# Altium PCB clouds_v302.PcbDoc
Units mil, origin at the board's own origin, x right, y up, seen from the top; angles counter-clockwise.
Board outline 3500 x 4175 mil, 2 copper layers (Top, Bottom), stack 61.811 mil thick; 156 components, 107 nets, 530 pads, 148 vias.
Unrouted connection lines stored in the file: 193.
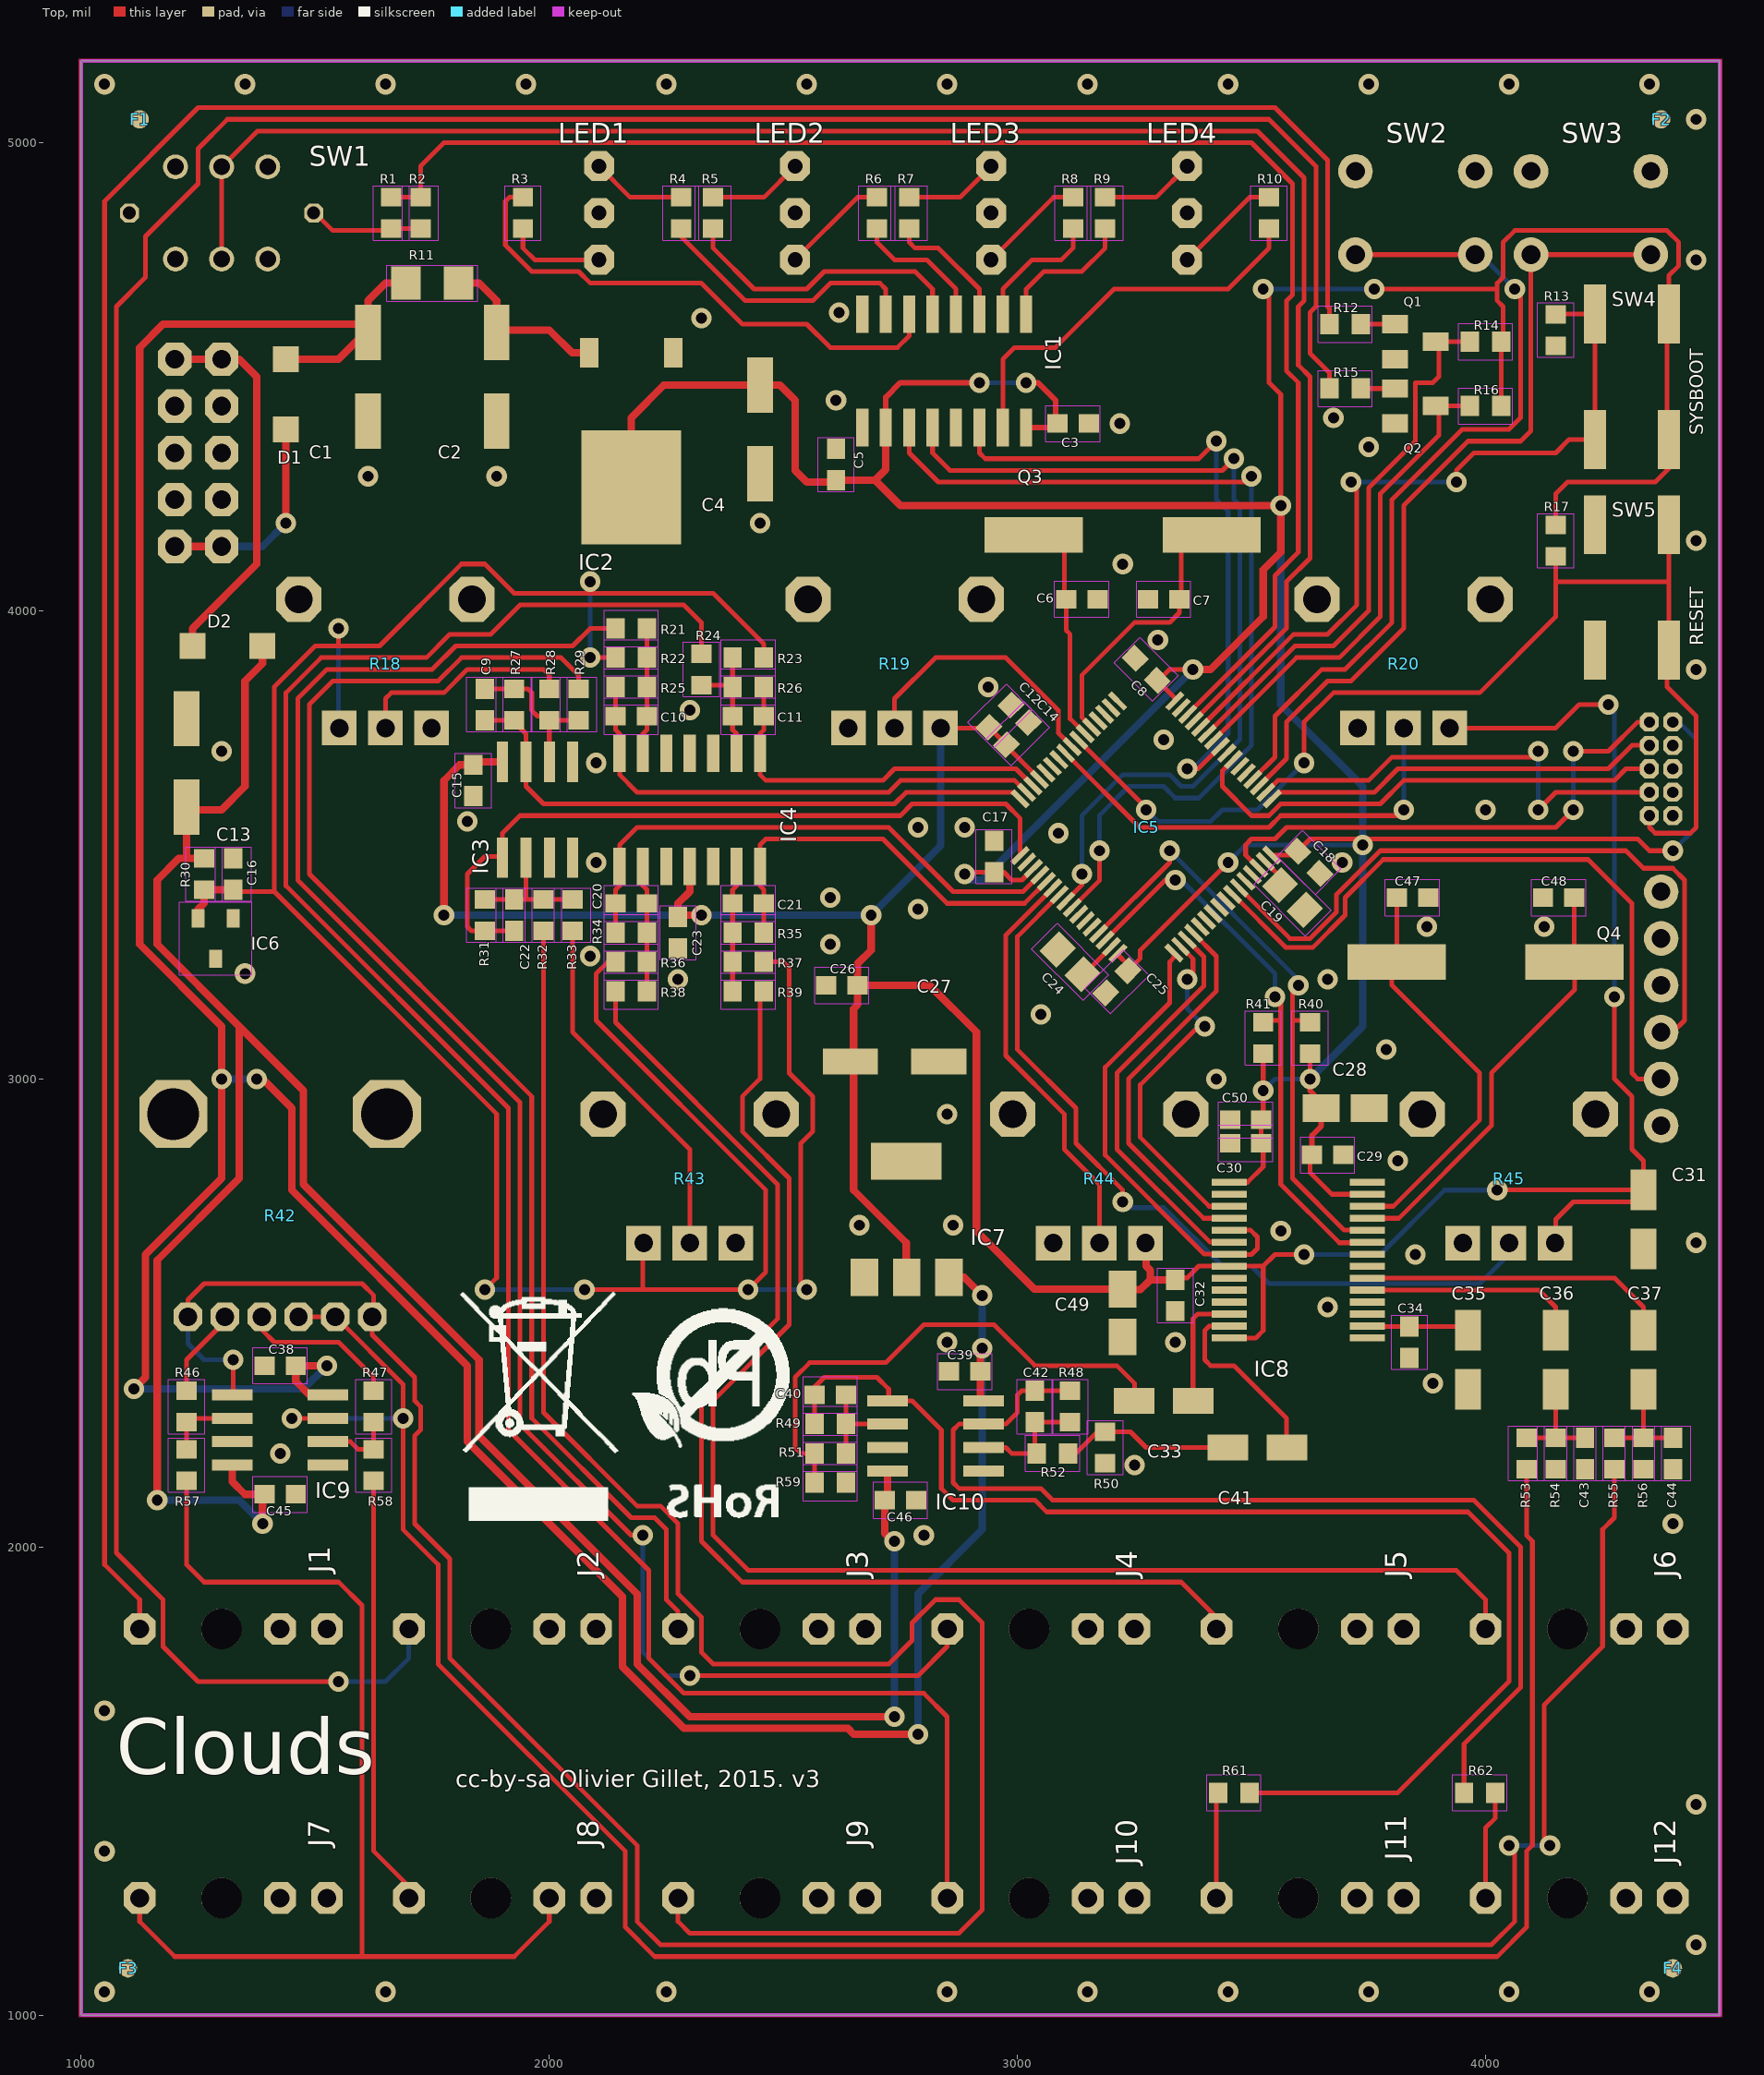
[diagram p0: Top view]
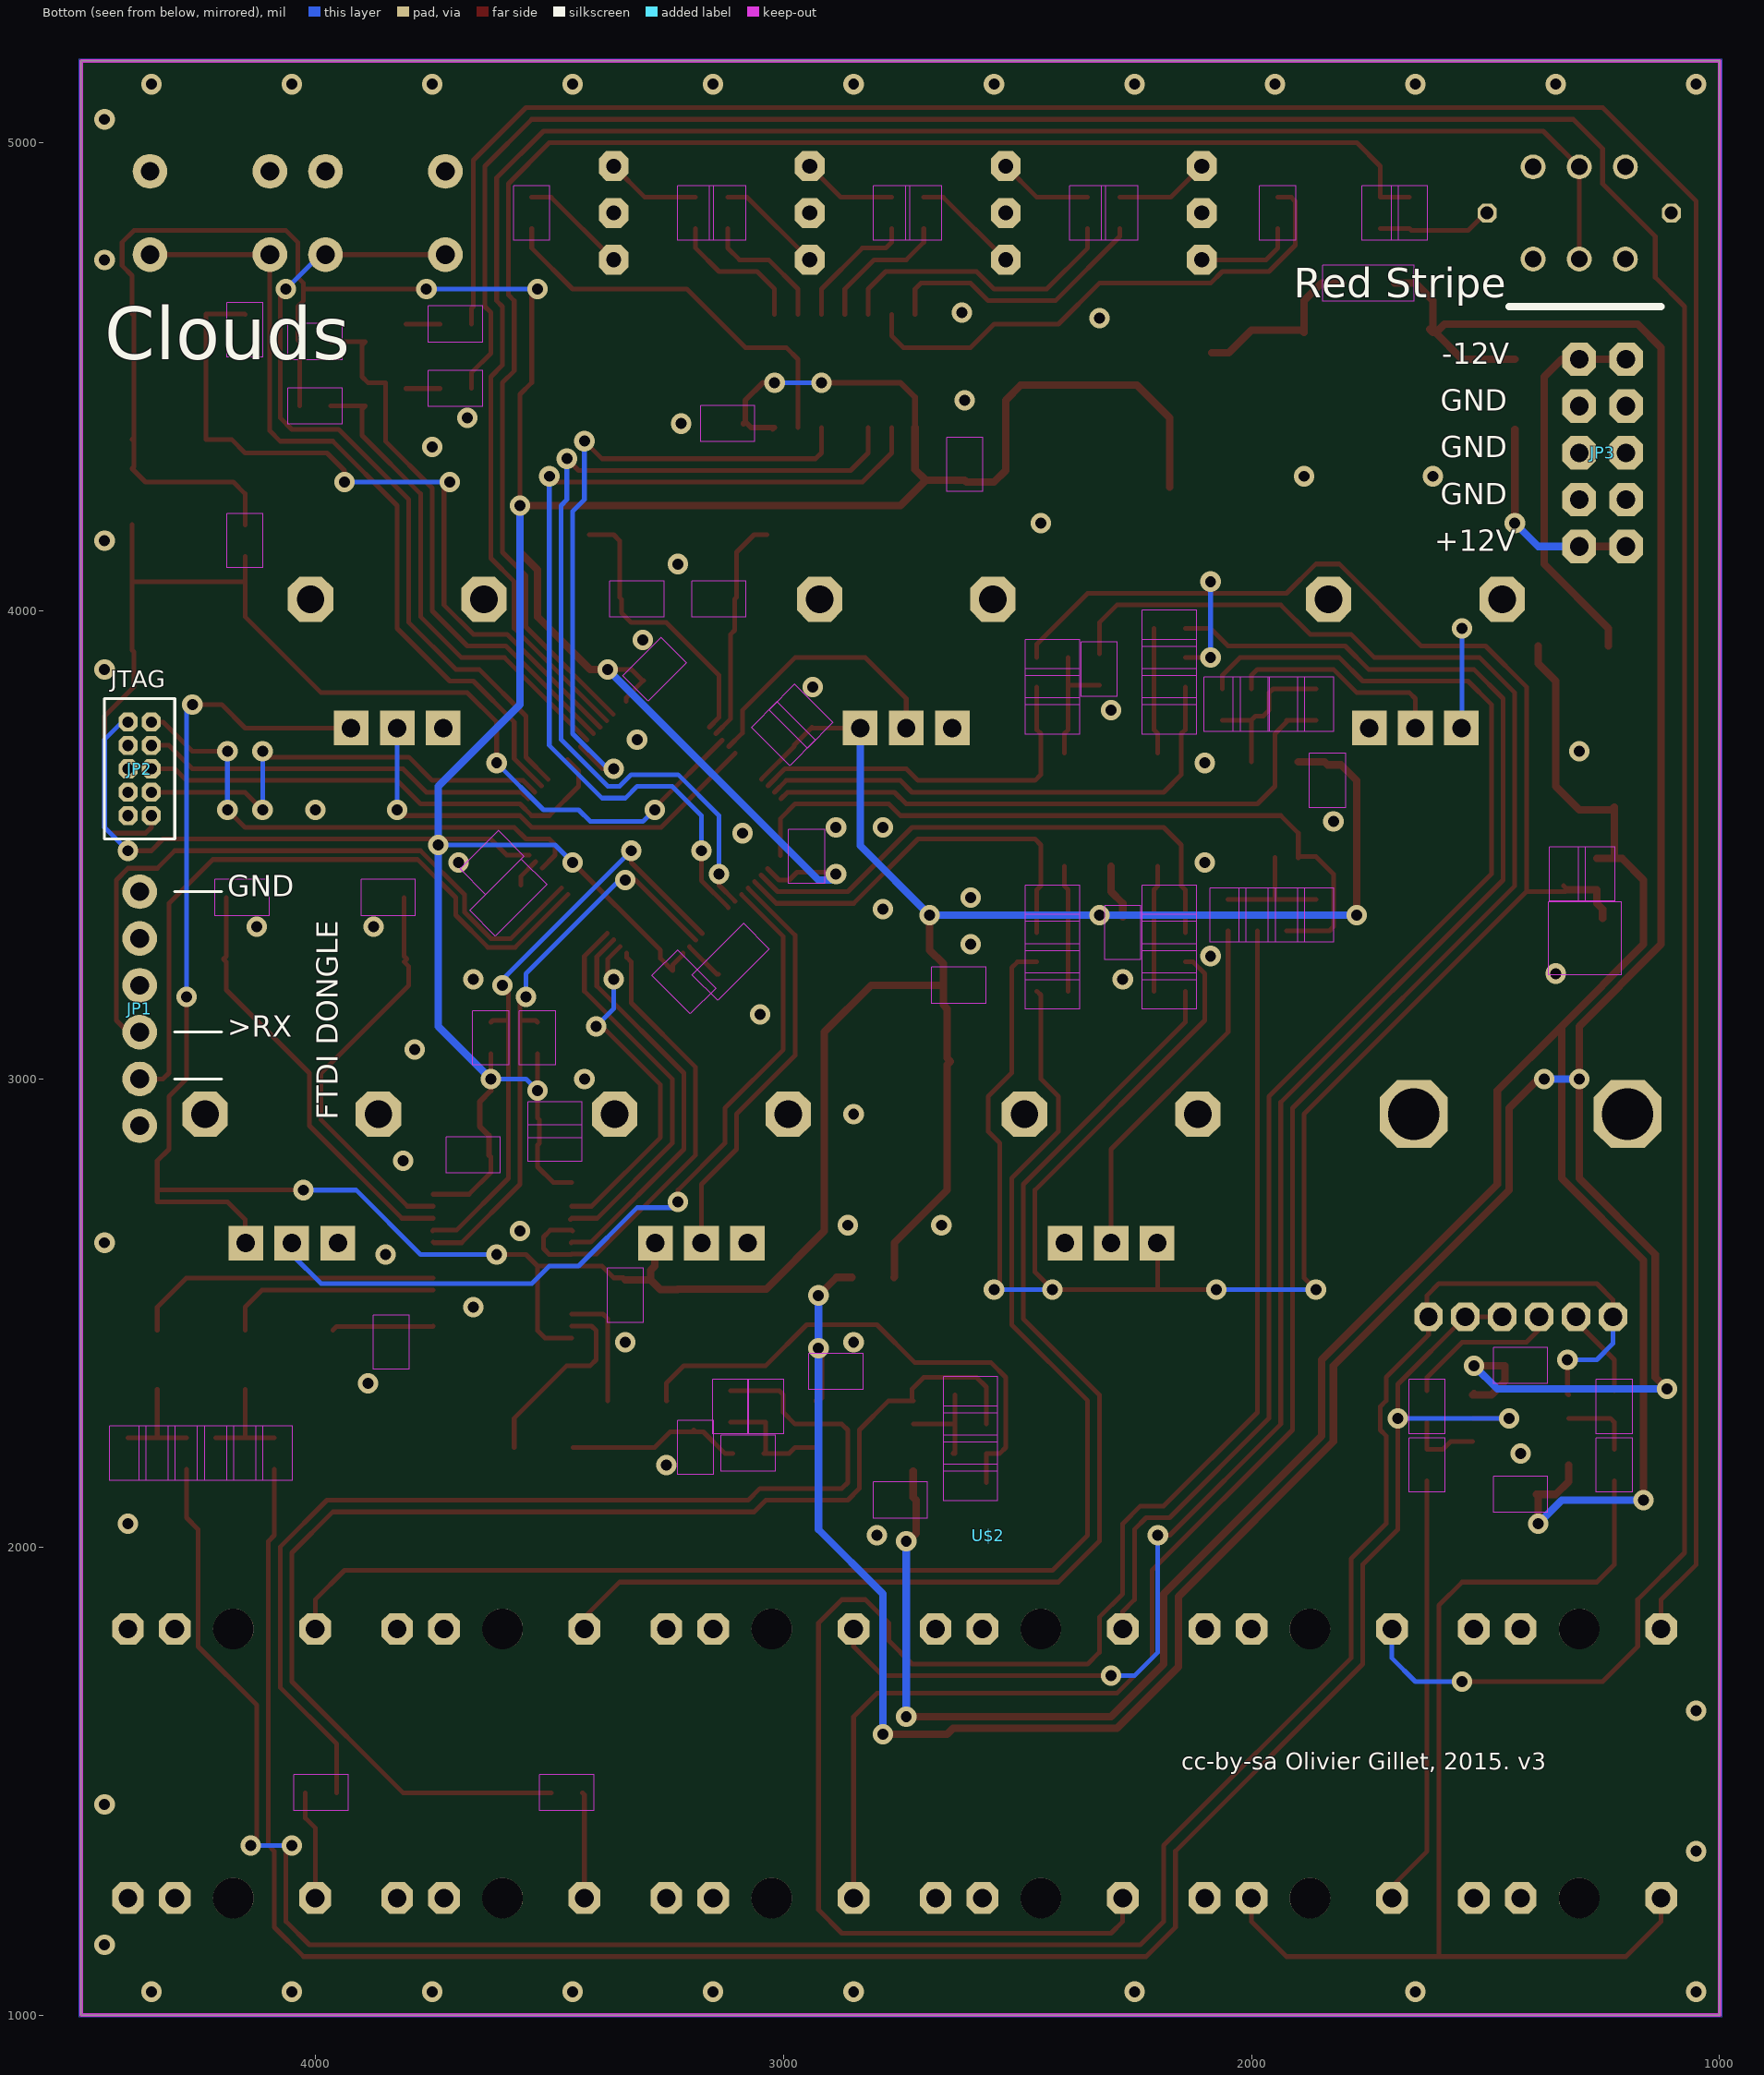
[diagram p1: Bottom view, seen from below]

## Layer stack, top to bottom
Top Solder: solder mask 0.4, Solder Resist, Dk 3.5
Top: signal copper 1.378
Dielectric 1: core 59.0551, FR-4, Dk 4.8
Bottom: signal copper 1.378
Bottom Solder: solder mask 0.4, Solder Resist, Dk 3.5

## Board outline
1000,1000 4500,1000 4500,5175 1000,5175

## Design rules (kind name [scope] priority, off if disabled: settings)
Clearance Clearance_2 [WithinRoom('vRestrict2') vs IsVia or IsThruPin] p1: gap=10 ignorepadtopadclearanceinfootprint=FALSE except(0: Arc-Hole Track-Hole SMDPad-Hole THPad-Hole Via-Hole Fill-Hole Poly-Hole Region-Hole Text-Hole)
Clearance Clearance_1 [WithinRoom('vRestrict1') vs IsVia or IsThruPin] p2: gap=10 ignorepadtopadclearanceinfootprint=FALSE except(0: Arc-Hole Track-Hole SMDPad-Hole THPad-Hole Via-Hole Fill-Hole Poly-Hole Region-Hole Text-Hole)
Clearance [All] p3: gap=7 ignorepadtopadclearanceinfootprint=FALSE except(0: SMDPad-SMDPad SMDPad-THPad SMDPad-Via)
Clearance "Clearance (Same Net)" [All] p4: gap=0 ignorepadtopadclearanceinfootprint=FALSE except(7: SMDPad-SMDPad SMDPad-THPad SMDPad-Via)
HoleSize HoleSize_1 [All] p1: absolutevalues=TRUE maxlimit=100000 minlimit=15.75 maxpercent=80.000 minpercent=20.000
HoleSize [All] p2: absolutevalues=TRUE maxlimit=100 minlimit=1 maxpercent=80.000 minpercent=20.000
HoleToHoleClearance mdViaViaSameLayer [All] p1: gap=8 allowstackedmicrovias=TRUE
HoleToHoleClearance [All] p2: gap=10 allowstackedmicrovias=TRUE
PasteMaskExpansion mlMinCreamFrame [All] p1: expansion=0
PasteMaskExpansion [All] p2: expansion=0
PolygonConnect ThermalVias [IsVia] p1: connectstyle=Direct reliefconductorwidth=10 reliefentries=4 polygonreliefangle="90 Angle" airgapwidth=10
PolygonConnect [All] p2: connectstyle=Relief reliefconductorwidth=10 reliefentries=4 polygonreliefangle="90 Angle" airgapwidth=10
RoomDefinition vRestrict2 [IsVia or IsThruPin vs False] p1: confinementstyle=ConfineOut formatcopy=TRUE lockcomponents=FALSE outline 3740,3130 4260,3130 4260,3370 3740,3370
RoomDefinition vRestrict1 [IsVia or IsThruPin vs False] p2: confinementstyle=ConfineOut formatcopy=TRUE lockcomponents=FALSE outline 2965,4042.5 3485,4042.5 3485,4282.5 2965,4282.5
RoutingVias [All] p1: holewidth=28 width=50 viastyle="Through Hole" minholewidth=28 minwidth=50 maxholewidth=28 maxwidth=50
SilkToSilkClearance [All] p1 off: silktosilkclearance=10
SilkToSolderMaskClearance [IsPad] p1 off: minsilkscreentomaskgap=10 clearancetoexposedcopper=TRUE
SolderMaskExpansion mlMinStopFrame [All] p1: expansion=3
SolderMaskExpansion [All] p2: expansion=4
Width Width_1 [All] p1: maxlimit=100000 minlimit=8 preferedwidth=10
Width [All] p2: maxlimit=10 minlimit=10 preferedwidth=10
25 further rules are at their usual default settings.

## Components (designator, comment, footprint, x,y, rotation, side; value= is the part's Value field where it differs from the comment)
C1 "47u" PANASONIC_D 1612.5,4500 r90 top
C2 "47u" PANASONIC_D 1887.5,4500 r90 top
C3 "100n" C0603 3118.75,4400 r0 top
C4 "47u" PANASONIC_D 2450,4387.5 r90 top
C5 "100n" C0603 2612.5,4312.5 r90 top
C6 "18p" C0603 3137.5,4025 r180 top
C7 "18p" C0603 3312.5,4025 r0 top
C8 "100n" C0603 3275,3875 r135 top
C9 "1n" C0603 1862.5,3800 r270 top
C10 "1n" C0603 2175,3775 r180 top
C11 "1n" C0603 2425,3775 r0 top
C12 "1u" C0603 2962.5,3775 r45 top
C13 "47u" PANASONIC_D 1225,3675 r90 top
C14 "100n" C0603 3000,3737.5 r45 top
C15 "100n" C0603 1837.5,3637.5 r270 top
C16 "100n" C0603 1325,3437.5 r90 top
C17 "100n" C0603 2950,3475 r90 top
C18 "100n" C0603 3622.5,3462.5 r315 top
C19 "2.2u" C0805 3587.5,3387.5 r315 top
C20 "1n" C0603 2175,3375 r180 top
C21 "1n" C0603 2425,3375 r0 top
C22 "1n" C0603 1925,3350 r270 top
C23 "100n" C0603 2275,3312.5 r270 top
C24 "2.2u" C0805 3112.5,3250 r135 top
C25 "100n" C0603 3212.5,3207.5 r225 top
C26 "100n" C0603 2625,3200 r180 top
C27 "47u" PANASONIC_D 2737.5,3037.5 r180 top
C28 "10u" PANASONIC_A 3700,2937.5 r180 top
C29 "100n" C0603 3662.5,2837.5 r0 top
C30 "100n" C0603 3487.5,2862.5 r180 top
C31 "10u" PANASONIC_B 4337.5,2700 r90 top
C32 "100n" C0603 3337.5,2537.5 r270 top
C33 "10u" PANASONIC_B 3312.5,2312.5 r0 top
C34 "100n" C0603 3837.5,2437.5 r270 top
C35 "10u" PANASONIC_B 3962.5,2400 r90 top
C36 "10u" PANASONIC_B 4150,2400 r90 top
C37 "10u" PANASONIC_B 4337.5,2400 r90 top
C38 "100n" C0603 1425,2387.5 r180 top
C39 "100n" C0603 2887.5,2375 r180 top
C40 "18p" C0603 2600,2325 r180 top
C41 "10u" PANASONIC_B 3512.5,2212.5 r0 top
C42 "18p" C0603 3037.5,2300 r90 top
C43 "220p" C0603 4212.5,2200 r270 top
C44 "220p" C0603 4400,2200 r270 top
C45 "100n" C0603 1425,2112.5 r180 top
C46 "100n" C0603 2750,2100 r180 top
C47 "18p" C0603 3843.75,3387.5 r180 top
C48 "18p" C0603 4156.25,3387.5 r0 top
C49 "10u" PANASONIC_A 3225,2500 r90 top
C50 "1u" C0603 3487.5,2912.5 r180 top
D1 "1N5819HW" SOD123 1437.5,4462.5 r270 top
D2 "1N5819HW" SOD123 1312.5,3925 r0 top
F1 "" FIDUCIAL-1X2 1125,5050 r0 top
F2 "" FIDUCIAL-1X2 4375,5050 r0 top
F3 "" FIDUCIAL-1X2 1100,1100 r0 top
F4 "" FIDUCIAL-1X2 4400,1100 r0 top
IC1 "74HC595D" SO16 2843.75,4512.5 r180 top
IC2 "LM1117-3.3" TO252 2175,4362.5 r180 top
IC3 "MCP6002" SO08_1 1975,3575 r0 top
IC4 "MCP6004" SO14 2300,3575 r0 top
IC5 "STM32F405RGT6" TQFP-10X10-64 3275,3537.5 r315 top
IC6 "LM4040B10" DBZ_R-PDSO-G3 1287.5,3300 r180 top
IC7 "LM1117-3.3" SOT223 2762.5,2700 r0 top
IC8 "WM8731" SSOP28 3600,2600 r270 top
IC9 "TL072D" SO08 1425,2250 r270 top
IC10 "TL072D" SO08 2825,2237.5 r270 top
J1 "" WQP_PJ_301M6 1300,1825 r90 top
J2 "" WQP_PJ_301M6 1875,1825 r90 top
J3 "" WQP_PJ_301M6 2450,1825 r90 top
J4 "" WQP_PJ_301M6 3025,1825 r90 top
J5 "" WQP_PJ_301M6 3600,1825 r90 top
J6 "" WQP_PJ_301M6 4175,1825 r90 top
J7 "" WQP_PJ_301M6 1300,1250 r90 top
J8 "" WQP_PJ_301M6 1875,1250 r90 top
J9 "" WQP_PJ_301M6 2450,1250 r90 top
J10 "" WQP_PJ_301M6 3025,1250 r90 top
J11 "" WQP_PJ_301M6 3600,1250 r90 top
J12 "" WQP_PJ_301M6 4175,1250 r90 top
JP1 "" 1X06 4375,3400 r270 bottom
JP2 "" 2X5-1.27 4350,3612.5 r180 bottom
JP3 "" AVR_ICSP 1250,4337.5 r0 bottom
LED1 "" LED-BICOLOR-THROUGHHOLE-5MM 2106.25,4850 r180 top
LED2 "" LED-BICOLOR-THROUGHHOLE-5MM 2525,4850 r180 top
LED3 "" LED-BICOLOR-THROUGHHOLE-5MM 2943.75,4850 r180 top
LED4 "" LED-BICOLOR-THROUGHHOLE-5MM 3362.5,4850 r180 top
Q1 "MMBT3904" SOT23-BEC 3850,4575 r270 top
Q2 "MMBT3904" SOT23-BEC 3850,4437.5 r270 top
Q3 "8MHz" HC49UP 3225,4162.5 r0 top
Q4 "12.288MHz" HC49UP 4000,3250 r0 top
R1 "68" R0603 1662.5,4850 r270 top
R2 "68" R0603 1725,4850 r270 top
R3 "68" R0603 1943.75,4850 r90 top
R4 "68" R0603 2281.25,4850 r270 top
R5 "68" R0603 2350,4850 r270 top
R6 "68" R0603 2700,4850 r270 top
R7 "68" R0603 2768.75,4850 r270 top
R8 "68" R0603 3118.75,4850 r270 top
R9 "68" R0603 3187.5,4850 r270 top
R10 "68" R0603 3537.5,4850 r270 top
R11 "4.7" R1206 1750,4700 r0 top
R12 "100k" R0603 3700,4612.5 r0 top
R13 "10k" R0603 4150,4600 r90 top
R14 "10k" R0603 4000,4575 r0 top
R15 "100k" R0603 3700,4475 r0 top
R16 "10k" R0603 4000,4437.5 r0 top
R17 "10k" R0603 4150,4150 r90 top
R18 "10kB" ALPS_POT_VERTICAL_PS 1650,4025 r180 top
R19 "10kB" ALPS_POT_VERTICAL_PS 2737.5,4025 r180 top
R20 "10kB" ALPS_POT_VERTICAL_PS 3825,4025 r180 top
R21 "100k" R0603 2175,3962.5 r180 top
R22 "200k" R0603 2175,3900 r180 top
R23 "200k" R0603 2425,3900 r0 top
R24 "100k" R0603 2325,3875 r90 top
R25 "33k" R0603 2175,3837.5 r0 top
R26 "33k" R0603 2425,3837.5 r180 top
R27 "66.5k" R0603 1925,3800 r90 top
R28 "200k" R0603 2000,3800 r90 top
R29 "100k" R0603 2062.5,3800 r90 top
R30 "470" R0603 1262.5,3437.5 r270 top
R31 "66.5k" R0603 1862.5,3350 r90 top
R32 "100k" R0603 1987.5,3350 r270 top
R33 "200k" R0603 2050,3350 r270 top
R34 "47k" R0603 2175,3312.5 r0 top
R35 "33k" R0603 2425,3312.5 r180 top
R36 "180k" R0603 2175,3250 r180 top
R37 "200k" R0603 2425,3250 r0 top
R38 "100k" R0603 2175,3187.5 r180 top
R39 "100k" R0603 2425,3187.5 r0 top
R40 "2.2k" R0603 3625,3087.5 r270 top
R41 "2.2k" R0603 3525,3087.5 r270 top
R42 "PTV112-4420A-A503" BOURNS_PTV112 1425,2925 r0 top
R43 "10kB" ALPS_POT_VERTICAL_PS 2300,2925 r180 top
R44 "10kB" ALPS_POT_VERTICAL_PS 3175,2925 r180 top
R45 "10kB" ALPS_POT_VERTICAL_PS 4050,2925 r180 top
R46 "3.3k" R0603 1225,2300 r270 top
R47 "3.3k" R0603 1625,2300 r270 top
R48 "39k" R0603 3112.5,2300 r270 top
R49 "39k" R0603 2600,2262.5 r0 top
R50 "39k" R0603 3187.5,2212.5 r90 top
R51 "5.6k" R0603 2600,2200 r180 top
R52 "5.6k" R0603 3075,2200 r0 top
R53 "5.6k" R0603 4087.5,2200 r270 top
R54 "5.6k" R0603 4150,2200 r90 top
R55 "5.6k" R0603 4275,2200 r270 top
R56 "5.6k" R0603 4337.5,2200 r90 top
R57 "22k" R0603 1225,2175 r270 top
R58 "22k" R0603 1625,2175 r270 top
R59 "39k" R0603 2600,2137.5 r180 top
R61 "1.0k" R0603 3462.5,1475 r0 top
R62 "1.0k" R0603 3987.5,1475 r180 top
SW1 "" LP4OA1PBCT 1300,4850 r0 top
SW2 "" TACTILE-PTH 3850,4850 r0 top
SW3 "" TACTILE-PTH 4225,4850 r0 top
SW4 "" EVQ-Q2 4312.5,4500 r270 top
SW5 "" EVQ-Q2 4312.5,4050 r270 top
U$2 "" ROHS_BIG 2562.5,2025 r180 bottom

## Footprints (in the part's own frame and the unit in brackets; to place one, negate y for a bottom-side part, rotate by r counter-clockwise, add the part's x,y. Pads: shape width x height; smd on the part's side, far side on the other; paste and mask are expansions set on the pad)
1X06 [mil] "1X06"
  round 74 hole 40: 1(0,0) 2(100,0) 3(200,0) 4(300,0) 5(400,0) 6(500,0)
2X5-1.27 [mil] "2X5-1.27"
  oct 40.67x40.67 hole 24: 1(-50,150) 2(0,150) 3(-50,100) 4(0,100) 5(-50,50) 6(0,50) 7(-50,0) 8(0,0) 9(-50,-50) 10(0,-50)
ALPS_POT_VERTICAL_PS [mm] "ALPS_POT_VERTICAL_PS"
  rect 1.88x1.88 hole 1: P$1(-2.5,7) P$2(0,7) P$3(2.5,7)
  oct 2.459x2.459 hole 1.5: P$4(-4.7,0) P$5(4.7,0)
AVR_ICSP [mil] "AVR_ICSP"
  oct 71.65x71.65 hole 40: 1(-50,200) 2(50,200) 3(-50,100) 4(50,100) 5(-50,0) 6(50,0) 7(-50,-100) 8(50,-100) 9(-50,-200) 10(50,-200)
BOURNS_PTV112 [mm] "BOURNS_PTV112"
  oct 1.549x1.549 hole 1: 1(-3,-11) 1P(-1,-11) 2(-5,-11) 2P(1,-11) 3(5,-11) 3P(3,-11)
  oct 3.689x3.689 hole 2.8: P$1(5.8,0) P$5(-5.8,0)
C0603 [mm] "C0603"
  rect 1.1x1 smd: 1(-0.85,0) 2(0.85,0)
  Keep-Out Layer lines w0.051: -1.473,-0.983 1.473,-0.983 1.473,0.983 -1.473,0.983 -1.473,-0.983
C0805 [mil] "C0805"
  rect 51.18x59.06 smd: 1(-37.4,0) 2(37.4,0)
  Keep-Out Layer lines w2: -77.68,-38.7 77.68,-38.7 77.68,38.7 -77.68,38.7 -77.68,-38.7
DBZ_R-PDSO-G3 [mm] "DBZ_R-PDSO-G3"
  rect 0.7x1 smd: 1(-0.95,-1.1) 2(0.95,-1.1) 3(0,1.1)
  Keep-Out Layer lines w0.051: 1.973,1.983 -1.973,1.983 -1.973,-1.983 1.973,-1.983 1.973,1.983
EVQ-Q2 [mm] "EVQ-Q2"
  rect 3.2x1.2 smd: A(-3.4,-2) A'(3.4,-2) B(-3.4,2) B'(3.4,2)
FIDUCIAL-1X2 [mm] "FIDUCIAL-1X2"
  rrect100% 1x1 smd paste-0.5: 1(0,0)
HC49UP [mil] "HC49UP"
  rect 210x76 smd: 1(-190,0) 2(190,0)
LED-BICOLOR-THROUGHHOLE-5MM [mil] "LED-BICOLOR-THROUGHHOLE-5MM"
  oct 63.9x63.9 hole 32: 1(0,100) 2(0,0) 3(0,-100)
LP4OA1PBCT [mm] "LP4OA1PBCT"
  oct 1.017x1.017 hole 0.7: L1(5,0) L2(-5,0)
  round 1.35 hole 0.9: P1(2.5,2.5) P2(0,2.5) P3(-2.5,2.5) P4(2.5,-2.5) P5(0,-2.5) P6(-2.5,-2.5)
PANASONIC_A [mm] "PANASONIC_A"
  rect 2x1.5 smd: +(1.3,0) -(-1.3,0)
PANASONIC_B [mil] "PANASONIC_B"
  rect 86.61x55.12 smd: +(62.99,0) -(-62.99,0)
PANASONIC_D [mm] "PANASONIC_D"
  rect 3x1.4 smd: +(2.4,0) -(-2.4,0)
R0603 [mm] "R0603"
  rect 1x1.1 smd: 1(-0.85,0) 2(0.85,0)
  Keep-Out Layer lines w0.051: 1.473,-0.983 1.473,0.983 -1.473,0.983 -1.473,-0.983 1.473,-0.983
R1206 [mil] "R1206"
  rect 62.99x70.98 smd: 1(-55.98,0) 2(55.98,0)
  Keep-Out Layer lines w2: -97.36,-38.7 97.36,-38.7 97.36,38.7 -97.36,38.7 -97.36,-38.7
ROHS_BIG [mil] "ROHS_BIG"
SO08 [mil] "SO08"
  rect 23.62x86.61 smd: 1(-75,-102.36) 2(-25,-102.36) 3(25,-102.36) 4(75,-102.36) 5(75,102.36) 6(25,102.36) 7(-25,102.36) 8(-75,102.36)
SO08_1 [mil] "SO08"
  rect 23.62x86.61 smd: 1(-75,-102.36) 2(-25,-102.36) 3(25,-102.36) 4(75,-102.36) 5(75,102.36) 6(25,102.36) 7(-25,102.36) 8(-75,102.36)
SO14 [mil] "SO14"
  rect 26x80 smd: 1(-150,-121) 2(-100,-121) 3(-50,-121) 4(0,-121) 5(50,-121) 6(100,-121) 7(150,-121) 8(150,121) 9(100,121) 10(50,121) 11(0,121) 12(-50,121) 13(-100,121) 14(-150,121)
SO16 [mil] "SO16"
  rect 26x80 smd: 1(-175,-121) 2(-125,-121) 3(-75,-121) 4(-25,-121) 5(25,-121) 6(75,-121) 7(125,-121) 8(175,-121) 9(175,121) 10(125,121) 11(75,121) 12(25,121) 13(-25,121) 14(-75,121) 15(-125,121) 16(-175,121)
SOD123 [mil] "SOD123"
  rect 55.12x55.12 smd: A(74.8,0) C(-74.8,0)
SOT23-BEC [mm] "SOT23-BEC"
  rect 1x1.4 smd: B(-0.95,-1.1) C(0,1.1) E(0.95,-1.1)
SOT223 [mil] "SOT223"
  rect 59x79 smd: 1(-89,-124) 2(1,-124) 3(91,-124)
  rect 150x79 smd: 4(0,124)
SSOP28 [mil] "SSOP28"
  rect 15x75 smd: 1(-179.13,-147.72) 2(-153.54,-147.72) 3(-127.95,-147.72) 4(-102.36,-147.72) 5(-76.77,-147.72) 6(-51.18,-147.72) 7(-25.59,-147.72) 8(0,-147.72) 9(25.59,-147.72) 10(51.18,-147.72) 11(76.77,-147.72) 12(102.36,-147.72) 13(127.95,-147.72) 14(153.54,-147.72) 15(153.54,147.72) 16(127.95,147.72) 17(102.36,147.72) 18(76.77,147.72) 19(51.18,147.72) 20(25.59,147.72) 21(0,147.72) 22(-25.59,147.72) 23(-51.18,147.72) 24(-76.77,147.72) 25(-102.36,147.72) 26(-127.95,147.72) 27(-153.54,147.72) 28(-179.13,147.72)
TACTILE-PTH [mil] "TACTILE-PTH"
  round 74 hole 40: 1(-128,89) 2(128,89) 3(-128,-89) 4(128,-89)
TO252 [mm] "TO252"
  rect 1x1.6 smd: 1(-2.28,-4.8) 2(2.28,-4.8)
  rect 5.4x6.2 smd: 3(0,2.5)
TQFP-10X10-64 [mil] "TQFP-10X10-64"
  rect 47.24x11.81 smd: 1(-233.72,147.64) 2(-233.72,127.95) 3(-233.72,108.27) 4(-233.72,88.58) 5(-233.72,68.9) 6(-233.72,49.21) 7(-233.72,29.53) 8(-233.72,9.84) 9(-233.72,-9.84) 10(-233.72,-29.53) 11(-233.72,-49.21) 12(-233.72,-68.9) 13(-233.72,-88.58) 14(-233.72,-108.27) 15(-233.72,-127.95) 16(-233.72,-147.64) 33(231.72,-147.64) 34(231.72,-127.95) 35(231.72,-108.27) 36(231.72,-88.58) 37(231.72,-68.9) 38(231.72,-49.21) 39(231.72,-29.53) 40(231.72,-9.84) 41(231.72,9.84) 42(231.72,29.53) 43(231.72,49.21) 44(231.72,68.9) 45(231.72,88.58) 46(231.72,108.27) 47(231.72,127.95) 48(231.72,147.64)
  rect 11.81x47.24 smd: 17(-147.64,-232.72) 18(-127.95,-232.72) 19(-108.27,-232.72) 20(-88.58,-232.72) 21(-68.9,-232.72) 22(-49.21,-232.72) 23(-29.53,-232.72) 24(-9.84,-232.72) 25(9.84,-232.72) 26(29.53,-232.72) 27(49.21,-232.72) 28(68.9,-232.72) 29(88.58,-232.72) 30(108.27,-232.72) 31(127.95,-232.72) 32(147.64,-232.72) 49(147.64,233.72) 50(127.95,233.72) 51(108.27,233.72) 52(88.58,233.72) 53(68.9,233.72) 54(49.21,233.72) 55(29.53,233.72) 56(9.84,233.72) 57(-9.84,233.72) 58(-29.53,233.72) 59(-49.21,233.72) 60(-68.9,233.72) 61(-88.58,233.72) 62(-108.27,233.72) 63(-127.95,233.72) 64(-147.64,233.72)
WQP_PJ_301M6 [mil] "WQP_PJ_301M6"
  round 86.61 hole 86.61: 1(0,0)
  oct 67.78x67.78 hole 40: P1(0,-225) P2(0,-125) P3(0,175)

## Part data
C1 C2 C4 C13 C27: library part PANASONIC_D
C3 C5 C6 C7 C8 C9 C10 C11 C12 C14 C15 C16 C17 C18 C20 C21 C22 C23 C25 C26 C29 C30 C32 C34 C38 C39 C40 C42 C43 C44 C45 C46 C47 C48 C50: library part C0603
C19 C24: library part C0805
C28 C49: library part PANASONIC_A
C31 C33 C35 C36 C37 C41: library part PANASONIC_B
D1 D2: library part SOD123
F1 F2 F3 F4: library part FIDUCIAL-1X2
IC1: library part SO16
IC2: library part TO252
IC3 IC9 IC10: library part SO08
IC4: library part SO14
IC5: library part TQFP-10X10-64
IC6: library part DBZ_R-PDSO-G3
IC7: library part SOT223
IC8: library part SSOP28
J1 J2 J3 J4 J5 J6 J7 J8 J9 J10 J11 J12: library part WQP_PJ_301M6
JP1: library part 1X06
JP2: library part 2X5-1.27
JP3: library part AVR_ICSP
LED1 LED2 LED3 LED4: library part LED-BICOLOR-THROUGHHOLE-5MM
Q1 Q2: library part SOT23-BEC
Q3 Q4: library part HC49UP
R1 R2 R3 R4 R5 R6 R7 R8 R9 R10 R12 R13 R14 R15 R16 R17 R21 R22 R23 R24 R25 R26 R27 R28 R29 R30 R31 R32 R33 R34 R35 R36 R37 R38 R39 R40 R41 R46 R47 R48 R49 R50 R51 R52 R53 R54 R55 R56 R57 R58 R59 R61 R62: library part R0603
R11: library part R1206
R18 R19 R20 R43 R44 R45: library part ALPS_POT_VERTICAL_PS
R42: library part BOURNS_PTV112
SW1: library part LP4OA1PBCT
SW2 SW3: library part TACTILE-PTH
SW4 SW5: library part EVQ-Q2
U$2: library part ROHS_BIG

## Via types
v1: diameter 43.62/43.62 (per signal layer), hole 23.62, Top to Bottom, 148 vias

## Nets (pads, with @x,y where several pads share a name; then routed paths per layer and width w, separated by ;. In a path a pad name is that pad's centre, name@x,y a point inside that pad or via, vN(x,y) a via of type N, cw(c..) or ccw(c..) an arc to the next point about the centre after c; other vN are vias at no path point)
+3V3: C3.1 C4.+ C5.1 C8.1 C17.1 C18.1 C25.1 C28.+ C29.1 C30.1 C50.1 IC1.10 IC1.16 IC2.3 IC5.19 IC5.32 IC5.48 IC5.64 IC8.1 IC8.27 JP2.1 R14.2 R16.2 R17.2 R40.2 R41.2 SW4.B SW4.B' | length 10567.2
  Top w10: v1(2887.5,3437.5) 2891.54,3441.54 C17.1 2970.96,3441.54 2987.5,3425 3009.39,3425 IC5.19 ; IC1.16 IC1.16@3022.75,4387.5 ; IC5.32@3214.84,3268.55 3214.84,3265.16 3236.17,3243.83 C25.1 3262.5,3257.5 3262.5,3275 v1(3450,3462.5) ; IC5.64 3335.87,3814.13 C8.1 3301.33,3851.33 3325,3875 v1(3375,3875) ; IC8.1 3491.63,2779.13 3525,2812.5 3525,2858.46 C30.1 C50.1 3525,2916.54 v1(3525,2975) R41.2 ; v1(3525,4687.5) 3537.5,4675 3537.5,4487.5 3562.5,4462.5 v1(3562.5,4225) ; IC5.48 3590.72,3478.05 C18.1 3625.17,3512.5 v1@3737.5,3512.5 ; v1(3625,3000) R40.2 ; C29.1 3625,2833.46 3625,2800 3671.46,2753.54 IC8.27 ; v1(3737.5,3500) v1@3737.5,3512.5 ; v1(3762.5,4687.5) 4025,4687.5 ; R16.2 R14.2 4037.5,4579.04 4037.5,4650 4025,4662.5 4025,4687.5 ; R17.2 4150,4250 4175,4275 4362.5,4275 4391.24,4303.74 4387.5,4307.48 SW4.B'@4387.5,4369.88 ; SW4.B' SW4.B'@4387.5,4369.88 ; v1(4400,3487.5) 4350,3487.5 4325,3512.5 v1@3737.5,3512.5 ; 4025,4687.5 4025,4700 4037.5,4712.5 4037.5,4787.5 4062.5,4812.5 4387.5,4812.5 4412.5,4787.5 4412.5,4737.5 4391.24,4716.24 SW4.B 4387.5,4637.6 SW4.B'@4387.5,4369.88
  Top w12: IC1.10 2718.75,4456.25 2750,4487.5 v1(2918.75,4487.5) ; IC1.16 3068.71,4391.5 C3.1@3081.25,4404.04 ; v1(3018.75,4487.5) 3043.75,4487.5 3081.25,4450 C3.1@3081.25,4404.04 ; C3.1 C3.1@3081.25,4404.04 ; v1(3625,3000) 3625,2975 3648.82,2951.18 C28.+ 3648.82,2898.82 3629.04,2879.04 C29.1
  Top w16: IC2.3 2175,4412.5 2244.49,4481.99 C4.+ 2493.01,4481.99 2525,4450 2525,4300 2550,4275 2608.46,4275 C5.1 2695.96,4279.04 ; IC1.10 2718.75,4301.82 2695.96,4279.04 ; v1(3375,3875) 3412.5,3875 3525,3987.5 3525,4087.5 3562.5,4125 v1(3562.5,4225) 2750,4225 2695.96,4279.04
  Bottom w10: v1(2918.75,4487.5) v1(3018.75,4487.5) ; v1(3450,3462.5) 3487.5,3500 v1(3737.5,3500) ; v1(3525,2975) 3550,3000 v1(3625,3000) ; v1(3525,4687.5) v1(3762.5,4687.5) ; v1(4400,3487.5) 4450,3537.5 4450,3725 4412.5,3762.5 JP2.1
  Bottom w16: v1(2887.5,3437.5) 2900,3425 2925,3425 v1(3375,3875) ; v1(3562.5,4225) 3562.5,3800 3737.5,3625 v1(3737.5,3500) 3737.5,3112.5 v1(3625,3000)
+3V3_A: C12.1 C14.1 C15.1 C23.1 C26.1 C27.+ C31.+ C32.1 C49.+ IC3.8 IC4.4 IC5.13 IC7.2 IC8.8 IC8.14 R19.P$1 R20.P$1 R44.P$1 R45.P$1 | length 7367.4
  Top w10: R19.P$1 2936.91,3749.41 C12.1 C14.1 2976.33,3710.89 IC5.13 ; C32.1 3341.54,2575 3362.5,2575 3387.5,2600 IC8.8 3525,2600 ; IC8.14 3508.96,2446.46 3525,2462.5 3525,2600 ; v1(3612.5,2625) 3550,2625 3525,2600 ; R20.P$1 4149.41,3749.41 4200,3800 v1(4262.5,3800) ; v1(4025,2762.5) 4025.49,2762.99 C31.+ ; R45.P$1 4150,2650.98 4150,2700 4187.5,2737.5 4337.5,2737.5 C31.+ ; v1(4275,3175) 4275,3000 4312.5,2962.5 4312.5,2850 4337.5,2825 C31.+
  Top w16: v1(1775,3350) 1775,3637.5 1808.46,3670.96 C15.1 1843.9,3677.36 IC3.8 ; IC4.4 2300,3400 2275,3375 C23.1 2279.04,3350 v1(2325,3350) ; v1(2687.5,3350) 2687.5,3275 2658.46,3245.96 C26.1 ; IC7.2 2762.5,2577 2762.5,2650 2650,2762.5 2650,3030.51 C27.+ 2650,3044.49 2650,3150 2658.46,3158.46 C26.1 ; R44.P$1 3275,2647.83 3275,2600 3283.46,2591.54 3283.46,2570.96 ; C32.1 3283.46,2570.96 ; C26.1 2812.5,3200 2912.5,3100 2912.5,2675 3036.32,2551.18 C49.+ 3226.18,2550 3262.5,2550 3283.46,2570.96
  Bottom w10: v1(3612.5,2625) 3775,2625 3912.5,2762.5 v1(4025,2762.5) ; v1(4262.5,3800) 4275,3787.5 v1(4275,3175)
  Bottom w16: v1(1775,3350) v1(2325,3350) v1(2687.5,3350) 2835.93,3498.43 R19.P$1
AREF_-10: C16.1 IC6.2 R18.P$3 R22.2 R23.2 R30.2 R36.2 R37.2 R43.P$3 | length 5934.6
  Top w10: C16.1@1333.46,3412.5 C16.1 1329.04,3400 1412.5,3400 ; v1(1550,3962.5) 1550,3925 ; v1(1862.5,2550) 1887.5,2575 1887.5,2925 1412.5,3400 ; v1(2075,2550) 2200,2550 ; v1(2087.5,3900) R22.2 ; v1(2087.5,4062.5) 2087.5,4037.5 ; R36.2 2125,3250 2100,3225 2100,3125 2462.5,2762.5 2462.5,2587.5 v1(2425,2550) 2200,2550 ; R43.P$3 2200,2647.83 2200,2550 ; R37.2 2500,3250 2512.5,3237.5 2512.5,3012.5 2562.5,2962.5 2562.5,2887.5 2537.5,2862.5 2537.5,2562.5 v1(2550,2550) ; R23.2 2458.46,3929.04 2350,4037.5 2087.5,4037.5 ; 1412.5,3400 1412.5,3837.5 1500,3925 1550,3925 ; 1550,3925 1637.5,3925 1812.5,4100 1862.5,4100 1925,4037.5 2087.5,4037.5
  Top w16: IC6.2 1250,3343.41 1250,3362.5 1262.5,3375 R30.2 C16.1
  Bottom w10: v1(1550,3962.5) 1550,3750.98 R18.P$3 ; v1(1862.5,2550) v1(2075,2550) ; v1(2087.5,3900) v1(2087.5,4062.5) ; v1(2425,2550) v1(2550,2550)
BLEND_CV: C21.2 IC4.7 IC5.21 R35.1 | length 884.2
  Top w10: R35.1 C21.2 2458.46,3404.04 2450,3412.5 IC4.7 2450,3500 2462.5,3512.5 2712.5,3512.5 2850,3375 3015.06,3375 IC5.21
BLEND_POT: IC5.23 R45.P$2 | length 1734.4
  Top w10: IC5.23 3000,3304.26 3000,3062.5 3125,2937.5 3125,2862.5 3225,2762.5 v1(3225,2737.5)
  Bottom w10: v1(3225,2737.5) 3237.5,2725 3312.5,2725 3437.5,2600 3500,2600 3537.5,2562.5 3987.5,2562.5 4050,2625 R45.P$2
BOOT_FLASH: IC5.60 R13.2 SW4.A SW4.A' | length 1634.6
  Top w10: IC5.60 3590.06,3950 3662.5,3950 3725,4012.5 3725,4262.5 v1(3712.5,4275) ; v1(3937.5,4275) 3937.5,4300 3975,4337.5 4150,4337.5 4178.64,4366.14 SW4.A' SW4.A 4150.39,4633.86 R13.2
  Bottom w10: v1(3712.5,4275) v1(3937.5,4275)
DENSITY_CV: C22.2 IC3.1 IC5.17 R31.1 | length 1583.8
  Top w10: C22.2 R31.1 1833.46,3316.54 1825,3325 1825,3437.5 1862.5,3475 1897.64,3475 IC3.1 1900,3525 1937.5,3562.5 2750,3562.5 2775,3587.5 2975,3587.5 3006.05,3556.45 IC5.17
GND: C1.- C2.- C3.2 C4.- C5.2 C6.1 C7.1 C8.2 C12.2 C13.+ C14.2 C15.2 C16.2 C17.2 C18.2 C19.2 C23.2 C24.2 C25.2 C26.2 C27.- C28.- C29.2 C30.2 C31.- C32.2 C34.2 C35.- C38.2 C39.2 C43.2 C44.2 C45.1 C46.1 C47.1 C48.1 C49.- C50.2 IC1.8 IC1.13 IC2.1 IC3.3 IC3.4 IC3.5 IC4.3 IC4.5 IC4.10 IC4.11 IC4.12 IC5.12 IC5.18 IC5.26 IC5.28 IC5.63 IC6.1 IC7.1 IC8.11 IC8.15 IC8.21 IC8.22 IC8.28 IC9.3 IC9.5 IC10.3 IC10.5 J1.P1 J1.P2 J2.P1 J2.P2 J3.P1 J4.P1 J5.P1 J6.P1 J7.P1 J8.P1 J9.P1 J10.P1 J11.P1 J12.P1 JP1.1 JP2.3 JP2.5 JP2.9 JP3.3 JP3.4 JP3.5 JP3.6 JP3.7 JP3.8 LED1.2 LED2.2 LED3.2 LED4.2 Q1.E Q2.E R13.1 R18.P$1 R19.P$3 R20.P$3 R43.P$1 R44.P$3 R45.P$3 R50.1 R54.1 R56.1 R59.1 SW1.L2 SW1.P3 SW1.P6 SW2.1 SW2.2 SW3.1 SW3.2 SW5.A SW5.A'
  other v1: 1050,1050 1650,1050 2250,1050 2850,1050 3150,1050 3450,1050 3750,1050 4050,1050 4350,1050 4450,1150 1050,1350 4450,1450 1050,1650 2800,2025 4400,2050 3250,2175 1425,2200 3887.5,2350 2850,2437.5 3337.5,2437.5 3662.5,2512.5 3850,2625 4450,2650 3562.5,2675 2662.5,2687.5 2862.5,2687.5 3812.5,2825 2850,2925 3425,3000 3787.5,3062.5 3050,3137.5 2275,3212.5 3662.5,3212.5 1350,3225 2087.5,3262.5 2600,3287.5 3875,3325 4125,3325 2787.5,3362.5 2600,3387.5 2100,3462.5 3693.75,3462.5 3087.5,3525 2787.5,3537.5 2887.5,3537.5 1825,3550 4000,3575 2100,3675 1300,3700 3312.5,3725 2300,3787.5 2937.5,3837.5 4450,3875 3300,3937.5 3225,4100 4450,4150 2450,4187.5 1612.5,4287.5 1887.5,4287.5 3750,4350 3218.75,4400 3675,4412.5 2612.5,4450 2325,4625 2618.75,4637.5 4450,4750 4450,5050 1050,5125 1350,5125 1650,5125 1950,5125 2250,5125 2550,5125 2850,5125 3150,5125 3450,5125 3750,5125 4050,5125 4350,5125
I2C_SCL: IC5.29 IC8.24 R40.1 | length 1307
  Top w10: IC5.29 3325,3462.23 v1(3325,3487.5) ; v1(3600,3200) 3587.5,3187.5 3587.5,3125 ; R40.1 3620.96,3125 3587.5,3125 ; IC8.24@3749.5,2675 IC8.24 3698.23,2676.77 3587.5,2787.5 3587.5,3125
  Bottom w10: v1(3325,3487.5) 3600,3212.5 v1(3600,3200)
I2C_SDA: IC5.30 IC8.23 R41.1 | length 1231
  Top w10: IC5.30 3315.61,3425 v1(3337.5,3425) ; R41.1 3529.04,3125 3562.5,3125 ; v1(3550,3175) 3562.5,3162.5 3562.5,3125 ; IC8.23 3746.54,2650 3687.5,2650 3562.5,2775 3562.5,3125
  Bottom w10: v1(3337.5,3425) 3350,3425 3550,3225 v1(3550,3175)
I2S_LRCK: IC5.33 IC8.5 IC8.7 | length 1004.5
  Top w10: IC5.33@3334.45,3269.26 3334.45,3259.45 3325,3250 3325,3162.5 3187.5,3025 3187.5,2837.5 3399.41,2625.59 IC8.7 3452.87,2625 3500,2625 3512.5,2637.5 3512.5,2662.5 3498.23,2676.77 IC8.5 IC8.5@3450.5,2675
I2S_SCK: IC5.34 IC8.3 | length 754.9
  Top w10: IC5.34 3375,3256.54 3375,3225 v1(3362.5,3212.5) ; v1(3400,3112.5) 3387.5,3112.5 3262.5,2987.5 3262.5,2875 3409.55,2727.95 IC8.3
  Bottom w10: v1(3362.5,3212.5) 3362.5,3150 v1(3400,3112.5)
I2S_SIN: IC5.35 IC8.6 | length 862.9
  Top w10: IC5.35 3398.44,3260.94 3398.44,3198.44 3212.5,3012.5 3212.5,2850 3411.32,2651.18 IC8.6 IC8.6@3453.46,2650
I2S_SOUT: IC5.36 IC8.4 | length 830.8
  Top w10: IC5.36 3425,3262.22 3425,3187.5 3237.5,3000 3237.5,2862.5 3397.64,2702.36 IC8.4 IC8.4@3454.64,2700
JTCK: IC5.49 JP2.4 | length 852.6
  Top w10: IC5.49 3558.79,3612.5 3762.5,3612.5 3812.5,3662.5 4262.5,3662.5 4312.5,3712.5 JP2.4
JTDI: IC5.50 JP2.8 | length 996.1
  Top w10: IC5.50 3555.95,3637.5 3750,3637.5 3800,3687.5 4100,3687.5 v1(4112.5,3700) ; v1(4112.5,3575) 4150,3612.5 JP2.8
  Bottom w10: v1(4112.5,3575) v1(4112.5,3700)
JTDO: IC5.55 JP2.6 | length 1046.5
  Top w10: IC5.55 3437.5,3658.24 3437.5,3625 3500,3562.5 3537.5,3562.5 3562.5,3587.5 3775,3587.5 3825,3637.5 4275,3637.5 4300,3662.5 JP2.6
JTMS: IC5.46 JP2.2 | length 1105.8
  Top w10: IC5.46 3487.5,3478.11 3487.5,3500 3500,3512.5 3550,3512.5 3575,3537.5 4150,3537.5 v1(4187.5,3575) ; v1(4187.5,3700) 4262.5,3700 4325,3762.5 JP2.2
  Bottom w10: v1(4187.5,3575) v1(4187.5,3700)
LED_DATA: IC1.14 IC5.57 | length 1437.7
  Top w10: IC1.14 2918.75,4337.5 2931.25,4325 3387.5,4325 v1(3425,4362.5) ; v1@3375,3662.5 v1(3362.5,3662.5) 3386.08,3662.5 IC5.57
  Bottom w10: v1(3362.5,3662.5) 3375,3662.5 3450,3737.5 3450,4212.5 3425,4237.5 v1(3425,4362.5)
LED_EN: IC1.12 IC5.24 | length 1951
  Top w10: IC1.12 2818.75,4337.5 2856.25,4300 3437.5,4300 v1(3462.5,4325) ; IC5.24 3137.5,3413.92 v1(3137.5,3437.5)
  Bottom w10: v1(3137.5,3437.5) 3137.5,3562.5 3225,3650 3325,3650 3350,3625 3375,3625 3475,3725 3475,4225 3462.5,4237.5 v1(3462.5,4325)
LED_REC: IC5.62 R1.1 R2.1 | length 3295.1
  Top w10: R1.1 R2.1 1725,4950 1775,5000 3500,5000 3587.5,4912.5 3587.5,4675 3575,4662.5 3575,4512.5 3600,4487.5 3600,4125 3550,4075 3550,3965.61 IC5.62
LED_SCK: IC1.11 IC5.25 | length 2019.5
  Top w10: IC1.11 2768.75,4337.5 2831.25,4275 3487.5,4275 v1(3500,4287.5) ; IC5.25 3175,3423.58 v1(3175,3487.5)
  Bottom w10: v1(3175,3487.5) 3175,3562.5 3237.5,3625 3312.5,3625 3337.5,3600 3387.5,3600 3500,3712.5 v1(3500,4287.5)
LIN: C37.+ IC8.20 | length 664.9
  Top w10: IC8.20 4275.59,2574.41 4337.5,2512.5 C37.+
LOUT: C33.+ IC8.12 | length 256.7
  Top w10: C33.+ 3375,2312.99 3375,2487.5 3385.14,2497.64 IC8.12
LOUT_JACK: J11.P3 R61.1 | length 226.7
  Top w10: J11.P3 3425,1470.96 R61.1
N$1: J4.P3 R21.2 | length 3832.9
  Top w10: R21.2 2087.5,3962.5 2050,3925 1800,3925 1750,3875 1525,3875 1462.5,3812.5 1462.5,3425 1937.5,2950 1937.5,2262.5 2175,2025 v1(2200,2025) ; v1(2300,1725) 2787.5,1725 2850,1787.5 J4.P3
  Bottom w10: v1(2200,2025) 2200,1775 2250,1725 v1(2300,1725)
N$2: C10.1 IC4.13 R21.1 R22.1 R25.2 | length 270
  Top w10: IC4.13 2200,3737.5 2208.46,3745.96 C10.1 R25.2 R22.1 R21.1
N$4: J10.P3 R24.2 | length 4507.5
  Top w10: R24.2 2325,3975 2287.5,4012.5 1937.5,4012.5 1875,3950 1787.5,3950 1737.5,3900 1512.5,3900 1437.5,3825 1437.5,3412.5 1912.5,2937.5 1912.5,2250 2212.5,1950 2212.5,1762.5 2287.5,1687.5 2800,1687.5 2850,1637.5 J10.P3
N$5: C11.1 IC4.9 R23.1 R24.1 R26.2 | length 275.7
  Top w10: R24.1 2387.5,3841.54 R26.2 ; R23.1 R26.2 ; IC4.9 2400,3737.5 2391.54,3745.96 C11.1 R26.2
N$6: J6.P3 R39.2 | length 3059.7
  Top w10: R39.2 2450,3179.04 2450,3000 2412.5,2962.5 2412.5,2887.5 2512.5,2787.5 2512.5,2475 2350,2312.5 2350,2025 2425,1950 3937.5,1950 4000,1887.5 J6.P3
N$7: C7.2 IC5.5 Q3.2 | length 609.3
  Top w10: IC5.5 3137.5,3772.43 3137.5,3862.5 3250,3975 3325,3975 3345.96,3995.96 C7.2 3350,4029.04 3350,4150 3362.5,4162.5 Q3.2
N$8: C6.2 IC5.6 Q3.1 | length 486.4
  Top w10: Q3.1 3062.5,4162.5 3100,4125 3100,4029.04 C6.2 3104.04,3958.46 3112.5,3950 3112.5,3769.59 IC5.6
N$9: LED4.3 R9.1 | length 202.6
  Top w10: R9.1 3295.96,4883.46 LED4.3
N$10: J5.P3 R38.2 | length 2577.9
  Top w10: R38.2 2141.54,3120.96 2487.5,2775 2487.5,2487.5 2325,2325 2325,2012.5 2412.5,1925 3350,1925 3425,1850 J5.P3
N$11: C20.1 IC4.2 R34.2 R36.1 R38.1 | length 270
  Top w10: IC4.2 2200,3412.5 2208.46,3404.04 C20.1 R34.2 R36.1 R38.1
N$12: LED4.1 R10.1 | length 230.3
  Top w10: LED4.1 3495.96,4883.46 R10.1
N$13: C19.1 IC5.47 | length 63.3
  Top w10: IC5.47 3561.05,3432.4 C19.1@3561.05,3413.95
N$14: J9.P3 R32.2 | length 3764.2
  Top w10: R32.2 1987.5,2287.5 2187.5,2087.5 2237.5,2087.5 2275,2050 2275,1900 2325,1850 2325,1775 2350,1750 2725,1750 2775,1800 2775,1837.5 2825,1887.5 2875,1887.5 2925,1837.5 2925,1225 2875,1175 2300,1175 2275,1200 J9.P3
N$15: C21.1 IC4.6 R35.2 R37.1 R39.1 | length 270
  Top w10: R39.1 R37.1 R35.2 C21.1 2391.54,3404.04 2400,3412.5 IC4.6
N$16: LED3.1 R8.1 | length 230.3
  Top w10: LED3.1 3077.21,4883.46 R8.1
N$17: C34.1 C35.+ IC8.16 | length 218.5
  Top w10: IC8.16 3748.81,2470.96 C34.1 3954.53,2470.96 C35.+
N$18: C37.- C44.1 R55.1 R56.2 | length 228.6
  Top w10: R55.1 R56.2 ; C37.- R56.2 ; C44.1 R56.2
N$19: C24.1 IC5.31 | length 86.4
  Top w10: C24.1@3138.95,3223.55 3142,3223.55 IC5.31
N$20: J8.P3 R58.2 | length 922.6
  Top w10: R58.2 1625,1350 1700,1275 J8.P3
N$21: J7.P3 J8.P2 R57.2 | length 2377.4
  Top w10: J7.P3 1125,1200 1200,1125 1600,1125 ; R57.2 1225,1962.5 1262.5,1925 1550,1925 1600,1875 1600,1125 ; J8.P2 2000,1200 1925,1125 1600,1125
N$22: C36.- C43.1 R53.1 R54.2 | length 228.6
  Top w10: R53.1 R54.2 ; C36.- R54.2 ; C43.1 R54.2
N$23: C41.- R50.2 R52.2 | length 379.7
  Top w10: R52.2 3125,2200 3170.96,2245.96 R50.2 ; R50.2@3191.54,2250 R50.2 ; C41.- 3275,2212.5 3241.54,2245.96 R50.2
N$24: C22.1 IC3.2 R31.2 R32.1 R33.1 | length 276.7
  Top w10: R31.2 C22.1 1950,3383.46 ; IC3.2 1950,3383.46 ; R33.1 R32.1 1950,3383.46
N$25: C42.1 IC10.6 R48.2 R52.1 | length 262.6
  Top w10: IC10.6 2975,2212.5 2987.5,2200 R52.1 3037.5,2204.04 C42.1 R48.2
N$26: R33.2 R43.P$2 | length 770.7
  Top w10: R33.2 2050,3100 2300,2850 R43.P$2
N$27: J3.P3 R29.2 | length 2991.5
  Top w10: R29.2 2062.5,3862.5 2025,3900 1812.5,3900 1762.5,3850 1537.5,3850 1487.5,3800 1487.5,3437.5 1962.5,2962.5 1962.5,2275 2175,2062.5 2225,2062.5 2250,2037.5 2250,1887.5 2275,1862.5 J3.P3
N$28: C42.2 IC10.7 R48.1 R62.2 | length 2263.6
  Top w10: R48.1 C42.2 3008.46,2333.46 3000,2325 3000,2287.5 2975,2262.5 IC10.7 2875,2262.5 2862.5,2250 2862.5,2137.5 2875,2125 3050,2125 3075,2100 3975,2100 4075,2000 4075,1700 3954.04,1579.04 R62.2
N$29: LED3.3 R7.1 | length 202.6
  Top w10: R7.1 2877.21,4883.46 LED3.3
N$30: C9.1 IC3.6 R27.2 R28.1 R29.1 | length 338.9
  Top w10: C9.1 R27.2 1954.04,3833.46 1962.5,3825 1962.5,3787.5 1975,3775 1991.54,3775 R28.1 ; IC3.6 R28.1 ; R29.1 R28.1
N$31: C33.- R51.2 R59.2 | length 1120.3
  Top w10: R59.2 R51.2 2537.5,2200 2525,2212.5 2525,2362.5 2556.25,2393.75 2718.75,2393.75 2800,2475 2950,2475 3037.5,2387.5 3212.5,2387.5 3250,2350 3250,2312.99 C33.-
N$32: C40.1 IC10.2 R49.2 R51.1 | length 219.9
  Top w10: R51.1 2637.5,2200 2633.46,2204.04 R49.2 ; C40.1 R49.2 ; IC10.2 R49.2
N$33: C40.2 IC10.1 R49.1 R61.2 | length 2745.1
  Top w10: R49.1 C40.2 2566.54,2341.54 2587.5,2362.5 2700,2362.5 2725,2337.5 2725,2314.86 IC10.1 2775,2312.5 2837.5,2250 2837.5,2125 2862.5,2100 3037.5,2100 3062.5,2075 3962.5,2075 4050,1987.5 4050,1712.5 3812.5,1475 R61.2
N$34: LED2.1 R6.1 | length 230.3
  Top w10: LED2.1 2658.46,4883.46 R6.1
N$35: R18.P$2 R28.2 | length 473.2
  Top w10: R18.P$2 1650,3812.5 1662.5,3825 1775,3825 1825,3875 1987.5,3875 2000,3862.5 R28.2
N$36: J2.P3 R15.1 | length 6905.4
  Top w10: v1(1550,1712.5) 1250,1712.5 1175,1787.5 1175,1887.5 1075,1987.5 1075,4650 1137.5,4712.5 1137.5,4800 1250,4912.5 1250,4987.5 1312.5,5050 3537.5,5050 3637.5,4950 3637.5,4650 3625,4637.5 3625,4550 3666.54,4508.46 R15.1
  Bottom w10: v1(1550,1712.5) 1650,1712.5 1700,1762.5 J2.P3
N$37: Q2.B R15.2 | length 73.3
  Top w10: R15.2 3733.56,4474.9 Q2.B
N$38: R1.2 R2.2 SW1.L1 | length 245.4
  Top w10: SW1.L1 1500,4850 1537.5,4812.5 1658.46,4812.5 R1.2 R2.2
N$39: LED2.3 R5.1 | length 202.6
  Top w10: R5.1 2458.46,4883.46 LED2.3
N$40: LED1.1 R3.1 | length 214.4
  Top w10: R3.1 1943.75,4775 1968.75,4750 LED1.1
N$41: LED1.3 R4.1 | length 202.6
  Top w10: LED1.3 2172.78,4883.46 R4.1
N$42: IC9.7 R42.2P R42.3P R53.2 | length 4920.8
  Top w10: v1(1450,2275) IC9.7 ; R42.2P R42.3P 1687.5,2347.54 v1(1687.5,2275) 1687.5,2037.5 1762.5,1962.5 1762.5,1750 2162.5,1350 2162.5,1187.5 2225,1125 4025,1125 4087.5,1187.5 4087.5,1350 4100,1362.5 4100,2012.5 4087.5,2025 R53.2
  Bottom w10: v1(1450,2275) v1(1687.5,2275)
N$43: IC1.15 R10.2 | length 854.7
  Top w10: IC1.15 2968.75,4537.5 2993.75,4562.5 3081.25,4562.5 3206.25,4687.5 3450,4687.5 3537.5,4775 R10.2
N$44: IC1.1 R9.2 | length 300.5
  Top w10: IC1.1 3018.75,4687.5 3056.25,4725 3137.5,4725 3187.5,4775 R9.2
N$45: IC1.2 R8.2 | length 281.8
  Top w10: IC1.2 2968.75,4687.5 3031.25,4750 3093.75,4750 3118.75,4775 R8.2
N$46: IC1.3 R7.2 | length 274.5
  Top w10: R7.2 2768.75,4787.5 2781.25,4775 2831.25,4775 2918.75,4687.5 IC1.3
N$47: IC1.4 R6.2 | length 293.2
  Top w10: R6.2 2700,4787.5 2737.5,4750 2806.25,4750 2868.75,4687.5 IC1.4
N$48: IC1.5 R5.2 | length 631.6
  Top w10: R5.2 2350,4775 2437.5,4687.5 2550,4687.5 2587.5,4725 2781.25,4725 2818.75,4687.5 IC1.5
N$49: IC1.6 R3.2 | length 1144.2
  Top w10: R3.2 1914.71,4883.46 1906.25,4875 1906.25,4781.25 1962.5,4725 2062.5,4725 2087.5,4700 2325,4700 2412.5,4612.5 2550,4612.5 2600,4562.5 2743.75,4562.5 2768.75,4587.5 IC1.6
N$50: IC1.7 R4.2 | length 585.7
  Top w10: R4.2 2281.25,4800 2418.74,4662.5 2562.5,4662.5 2600,4700 2706.25,4700 2718.75,4687.5 IC1.7
N$51: IC9.1 R42.2 R42.3 R55.2 | length 5328.7
  Top w10: R42.2 1228.15,2528.15 1262.5,2562.5 1600,2562.5 1625,2537.5 1625,2495.08 R42.3 1621.85,2453.15 1712.5,2362.5 1712.5,2312.5 1725,2300 1725,2250 1712.5,2237.5 1712.5,2050 1787.5,1975 1787.5,1762.5 2187.5,1362.5 2187.5,1200 2237.5,1150 4012.5,1150 4062.5,1200 4062.5,1350 v1(4050,1362.5) ; IC9.1 1325,2327.36 v1(1325,2400) ; v1(4137.5,1362.5) 4125,1375 4125,1662.5 4250,1787.5 4250,2037.5 4275,2062.5 R55.2
  Bottom w10: R42.2 1228.15,2434.35 1262.5,2400 v1(1325,2400) ; v1(4050,1362.5) v1(4137.5,1362.5)
N$52: R42.1P R47.1 | length 338.2
  Top w10: R42.1P 1387.5,2490.06 1387.5,2462.5 1412.5,2437.5 1550,2437.5 1625,2362.5 R47.1
N$53: R42.1 R46.1 | length 192.4
  Top w10: R46.1 1225,2400 1306.89,2481.89 R42.1
N$54: IC9.6 R47.2 R58.1 | length 162.6
  Top w10: IC9.6 1575,2225 1591.54,2208.46 R58.1 R47.2
N$55: C2.+ IC2.2 R11.2 | length 385.2
  Top w16: R11.2 1850,4700 1887.5,4662.5 C2.+ 1893.01,4600 2000,4600 2048.52,4551.48 IC2.2
N$56: D1.A JP3.1 JP3.2 | length 458.6
  Top w16: JP3.1 JP3.2 ; v1(1437.5,4187.5) 1437.5,4387.3 1437.3,4387.5 D1.A
  Bottom w16: JP3.2 1350,4137.5 1387.5,4137.5 v1(1437.5,4187.5)
N$57: J1.P3 R12.1 | length 6174.7
  Top w10: J1.P3 1125,1887.5 1050,1962.5 1050,4875 1250,5075 3550,5075 3662.5,4962.5 3662.5,4650 3666.54,4645.96 R12.1
N$58: IC9.2 R46.2 R57.1 | length 159.2
  Top w10: R57.1 R46.2 1233.46,2275 IC9.2
N$59: C47.2 IC8.26 Q4.1 | length 878.1
  Top w10: IC8.26 3802.95,2727.95 3987.5,2912.5 3987.5,3012.5 3800,3200 3800,3240 Q4.1 3804.04,3255.96 3810.29,3262.22 C47.2
N$60: C48.2 IC8.25 Q4.2 | length 912.7
  Top w10: IC8.25 3814.86,2702.36 4012.5,2900 4012.5,3012.5 4190,3190 Q4.2 4195.96,3255.96 4189.72,3262.21 C48.2
N$64: D2.C JP3.9 JP3.10 | length 822.4
  Top w16: JP3.9 JP3.10 1337.5,4537.5 1375,4500 1375,4100 1237.7,3962.7 D2.C
N$66: Q1.B R12.2 | length 73.3
  Top w10: R12.2 3733.56,4612.4 Q1.B
PITCH_POT: IC5.9 R20.P$2 | length 977.7
  Top w10: IC5.9 3261.07,3537.5 3537.5,3537.5 3562.5,3562.5 3812.5,3562.5 v1(3825,3575)
  Bottom w10: v1(3825,3575) R20.P$2
PLAY: IC5.58 Q2.C R16.1 | length 1042.7
  Top w10: IC5.58 3595.74,3900 3687.5,3900 3775,3987.5 3775,4250 3900,4375 3900,4430.81 Q2.C R16.1
POSITION_POT_CV: C9.2 IC3.7 IC5.16 R27.1 | length 1303.8
  Top w10: C9.2 R27.1 1925,3762.5 1950,3737.5 IC3.7 1950,3625 1987.5,3587.5 2737.5,3587.5 2762.5,3612.5 2991.2,3612.5 IC5.16 IC5.16@3003.7,3600
REC: IC5.59 Q1.C R14.1 | length 1188.3
  Top w10: IC5.59 3592.9,3925 3675,3925 3750,4000 3750,4262.5 3850,4362.5 3850,4487.5 3887.5,4487.5 3900,4500 3900,4568.31 Q1.C R14.1
RESET: IC5.7 JP2.10 R17.1 SW5.B SW5.B' | length 2505.7
  Top w10: IC5.7 3275,3579.25 v1(3275,3575) ; v1(3612.5,3675) 3612.5,3762.5 3675,3825 3987.5,3825 4150,3987.5 4150,4062.5 ; R17.1 4150,4062.5 ; JP2.10 4350,3537.5 4362.5,3525 4437.5,3525 4450,3537.5 4450,3775 4387.5,3837.5 4387.5,3912.4 SW5.B' 4391.24,4062.5 ; SW5.B 4391.24,4062.5 ; 4150,4062.5 4391.24,4062.5
  Bottom w10: v1(3275,3575) 3300,3550 3412.5,3550 3437.5,3575 3512.5,3575 v1(3612.5,3675)
RIN: C36.+ IC8.19 | length 466.8
  Top w10: IC8.19 4113.68,2548.82 4150,2512.5 C36.+
ROUT: C41.+ IC8.13 | length 408.2
  Top w10: IC8.13 3409.55,2472.05 3400,2462.5 3400,2400 3412.5,2387.5 3462.5,2387.5 3575,2275 3575,2212.99 C41.+
ROUT_JACK: J12.P3 R62.1 | length 233.7
  Top w10: J12.P3 4000,1400 4020.96,1420.96 R62.1
RX: IC5.43 JP1.4 | length 1482.2
  Top w10: IC5.43 3582.09,3300 3625,3300 3681.25,3356.25 3681.25,3393.75 3775,3487.5 4300,3487.5 4337.5,3450 4400,3450 4425,3425 4425,3125 4400,3100 JP1.4
SIZE_CV: C10.2 IC4.14 IC5.15 R25.1 | length 1096.6
  Top w10: R25.1 C10.2 2141.54,3745.96 2150,3737.5 IC4.14 2150,3650 2187.5,3612.5 2725,3612.5 2750,3637.5 2994.04,3637.5 IC5.15
SIZE_POT: IC5.8 R19.P$2 | length 585.8
  Top w10: R19.P$2 2737.5,3812.5 2825,3900 2975,3900 3087.5,3787.5 3087.5,3738.92 IC5.8
SW_LOAD: IC5.51 SW3.3 SW3.4 | length 1726.3
  Top w10: IC5.51 3575,3684.39 3575,3762.5 3662.5,3850 3712.5,3850 3825,3962.5 3825,4225 3962.5,4362.5 4075,4362.5 4097,4384.5 SW3.3 SW3.4
SW_MODE: IC5.52 SW2.3 SW2.4 | length 1748.3
  Top w10: IC5.52 3550,3687.22 3550,3775 3650,3875 3700,3875 3800,3975 3800,4237.5 3950,4387.5 4050,4387.5 4075,4412.5 4075,4675 v1(4062.5,4687.5) ; SW2.3 SW2.4
  Bottom w10: SW2.4 3989,4761 v1(4062.5,4687.5)
SW_REC: IC5.61 SW1.P2 SW1.P5 | length 3860.1
  Top w10: SW1.P5 SW1.P2 1376.57,5025 3512.5,5025 3612.5,4925 3612.5,4662.5 3600,4650 3600,4525 3625,4500 3625,4112.5 3575,4062.5 3575,3962.78 IC5.61
TEXTURE_CV: C11.2 IC4.8 IC5.14 R26.1 | length 804.7
  Top w10: R26.1 C11.2 2458.46,3745.96 2450,3737.5 IC4.8 2450,3650 2462.5,3637.5 2712.5,3637.5 2737.5,3662.5 2996.88,3662.5 IC5.14
TEXTURE_POT: IC5.22 R44.P$2 | length 882.9
  Top w10: IC5.22 2975,3307.09 2975,3050 3100,2925 3100,2850 3175,2775 R44.P$2
TX: IC5.42 JP1.5 | length 1468.3
  Top w10: IC5.42 3573,3281.25 3631.25,3281.25 3700,3350 3700,3387.5 3781.25,3468.75 4218.75,3468.75 4312.5,3375 4312.5,3012.5 4325,3000 JP1.5
V_OCT: C20.2 IC4.1 IC5.20 R34.1 | length 1176
  Top w10: R34.1 C20.2 2141.54,3404.04 2150,3412.5 IC4.1 2150,3500 2187.5,3537.5 2725,3537.5 2862.5,3400 3012.23,3400 IC5.20
VBAT: IC5.1
VCC: C1.+ C38.1 C39.1 D1.C IC7.3 IC9.8 IC10.8 R11.1 | length 7449.9
  Top w16: v1(1112.5,2337.5) 1137.5,2362.5 1137.5,2625 1300,2787.5 v1(1300,3000) 1300,3112.5 1125,3287.5 1125,4562.5 1175,4612.5 1587.5,4612.5 1605.51,4594.49 C1.+ ; v1(1375,3000) 1375,3012.5 1450,2937.5 1450,2762.5 1825,2387.5 1825,2225 2156.25,1893.75 2156.25,1743.75 2287.5,1612.5 2637.5,1612.5 2650,1600 v1(2787.5,1600) ; D1.C 1437.7,4537.5 1550,4537.5 1606.99,4594.49 C1.+ ; v1(1525,2387.5) C38.1 1458.46,2354.04 1487.5,2325 1522.64,2325 1525,2327.36 IC9.8 ; C1.+@1619.49,4601.48 C1.+ ; R11.1 1650,4700 1612.5,4662.5 C1.+ ; IC7.3 2886.5,2576 v1(2925,2537.5) ; v1(2925,2425) 2920.96,2420.96 C39.1 2920.96,2318.9 IC10.8
  Bottom w16: v1(1112.5,2337.5) 1475,2337.5 v1(1525,2387.5) ; v1(1300,3000) v1(1375,3000) ; v1(2787.5,1600) 2787.5,1900 2925,2037.5 v1(2925,2425) v1(2925,2537.5)
VEE: C13.- C45.2 C46.2 D2.A IC9.4 IC10.4 R30.1 | length 5437.2
  Top w16: v1(1162.5,2100) 1162.5,2612.5 1337.5,2787.5 1337.5,3112.5 ; R30.1 1225,3470.96 ; IC9.4 1322.64,2139.86 1350,2112.5 C45.2 1387.5,2108.46 v1(1387.5,2050) ; D2.A 1387.3,3887.3 1350,3850 1350,3625 1300,3575 1230.51,3575 C13.- 1225,3470.96 ; IC10.4 2722.64,2106.1 C46.2 2716.54,2029.04 2733.07,2012.5 v1(2737.5,2012.5) ; v1(2737.5,1637.5) 2300,1637.5 2187.5,1750 2187.5,1900 1850,2237.5 1850,2400 1475,2775 1475,2975 1337.5,3112.5 ; 1225,3470.96 1208.46,3470.96 1162.5,3425 1162.5,3287.5 1337.5,3112.5
  Bottom w16: v1(1162.5,2100) 1337.5,2100 v1(1387.5,2050) ; v1(2737.5,1637.5) v1(2737.5,2012.5)
pads on no net: F1.1 F2.1 F3.1 F4.1 IC1.9 IC5.2 IC5.3 IC5.4 IC5.10 IC5.11 IC5.27 IC5.37 IC5.38 IC5.39 IC5.40 IC5.41 IC5.44 IC5.45 IC5.53 IC5.54 IC5.56 IC6.3 IC7.4 IC8.2 IC8.9 IC8.10 IC8.17 IC8.18 J1.1 J2.1 J3.1 J3.P2 J4.1 J4.P2 J5.1 J5.P2 J6.1 J6.P2 J7.1 J7.P2 J8.1 J9.1 J9.P2 J10.1 J10.P2 J11.1 J11.P2 J12.1 J12.P2 JP1.2 JP1.3 JP1.6 JP2.7 R18.P$4 R18.P$5 R19.P$4 R19.P$5 R20.P$4 R20.P$5 R42.P$1 R42.P$5 R43.P$4 R43.P$5 R44.P$4 R44.P$5 R45.P$4 R45.P$5 SW1.P1 SW1.P4

## Polygon pours and split planes (outlines as drawn)
GND on Top "Top-GND" (solid, remove dead copper, shelved, pour order 2): 996,5179 4504,5179 4504,996 996,996
GND on Bottom "Bottom-GND" (solid, remove dead copper, shelved, pour order 0): 996,5179 996,996 4504,996 4504,5179

## Keep-outs
Keep-Out Layer:
  the board outline again, w8

## Silkscreen, mask and mechanical layers (free items; w line width, h text height)
Top Overlay:
  text "SYSBOOT" at 4475,4375 h49.6 r90
  text "RESET" at 4475,3925 h49.6 r90
  text "Clouds" at 1075,1475 h204.6
  text "cc-by-sa Olivier Gillet, 2015. v3" at 1800,1475 h62
Bottom Overlay:
  lines w6: 4200,3000 4300,3000 ; 4200,3100 4300,3100 ; 4200,3400 4300,3400 ; 4300,3512.5 4450,3512.5 4450,3812.5 4300,3812.5 4300,3512.5
  lines w16: 1125,4650 1450,4650
  text "Red Stripe" at 1909.44,4648.56 h108.5
  text "-12V" at 1593.58,4512.71 h77.5
  text "Clouds" at 4450,4500 h193.75
  text "GND" at 1596.61,4412.9 h77.5
  text "GND" at 1596.61,4312.9 h77.5
  text "GND" at 1596.61,4212.9 h77.5
  text "+12V" at 1609.32,4112.71 h77.5
  text "JTAG" at 4437.5,3825 h62
  text "GND" at 4187.5,3375 h77.5
  text ">RX" at 4187.5,3075 h77.5
  text "FTDI DONGLE" at 3937.5,2912.5 h77.5 r270
  text "cc-by-sa Olivier Gillet, 2015. v3" at 2150,1512.5 h62
Dimension:
  the board outline again, w8
Bottom Assembly:
  lines w6: 1450,4137.5 1375,4137.5 ; 1450,4237.5 1375,4237.5 ; 1450,4337.5 1375,4337.5 ; 1450,4437.5 1375,4437.5 ; 1450,4537.5 1375,4537.5 ; 1375,4137.5 1375,4037.5 1125,4037.5 1125,4612.5 1375,4612.5 1375,4537.5 ; 1375,4137.5 1375,4237.5 ; 1375,4237.5 1375,4337.5 ; 1375,4337.5 1375,4437.5 ; 1375,4437.5 1375,4537.5 ; 4300,2825 4450,2825 4450,3475 4300,3475 4300,2825
  lines w10: 3962.5,2825 3962.5,2887.5 ; 3962.5,3412.5 3962.5,3475